# Altium PCB Holder.PcbDoc
Units mm, origin at the board's own origin, x right, y up, seen from the top; angles counter-clockwise.
Board outline 100 x 100 mm, 2 copper layers (Top Layer, Bottom Layer); 8 components, 129 nets, 212 pads, 0 vias.
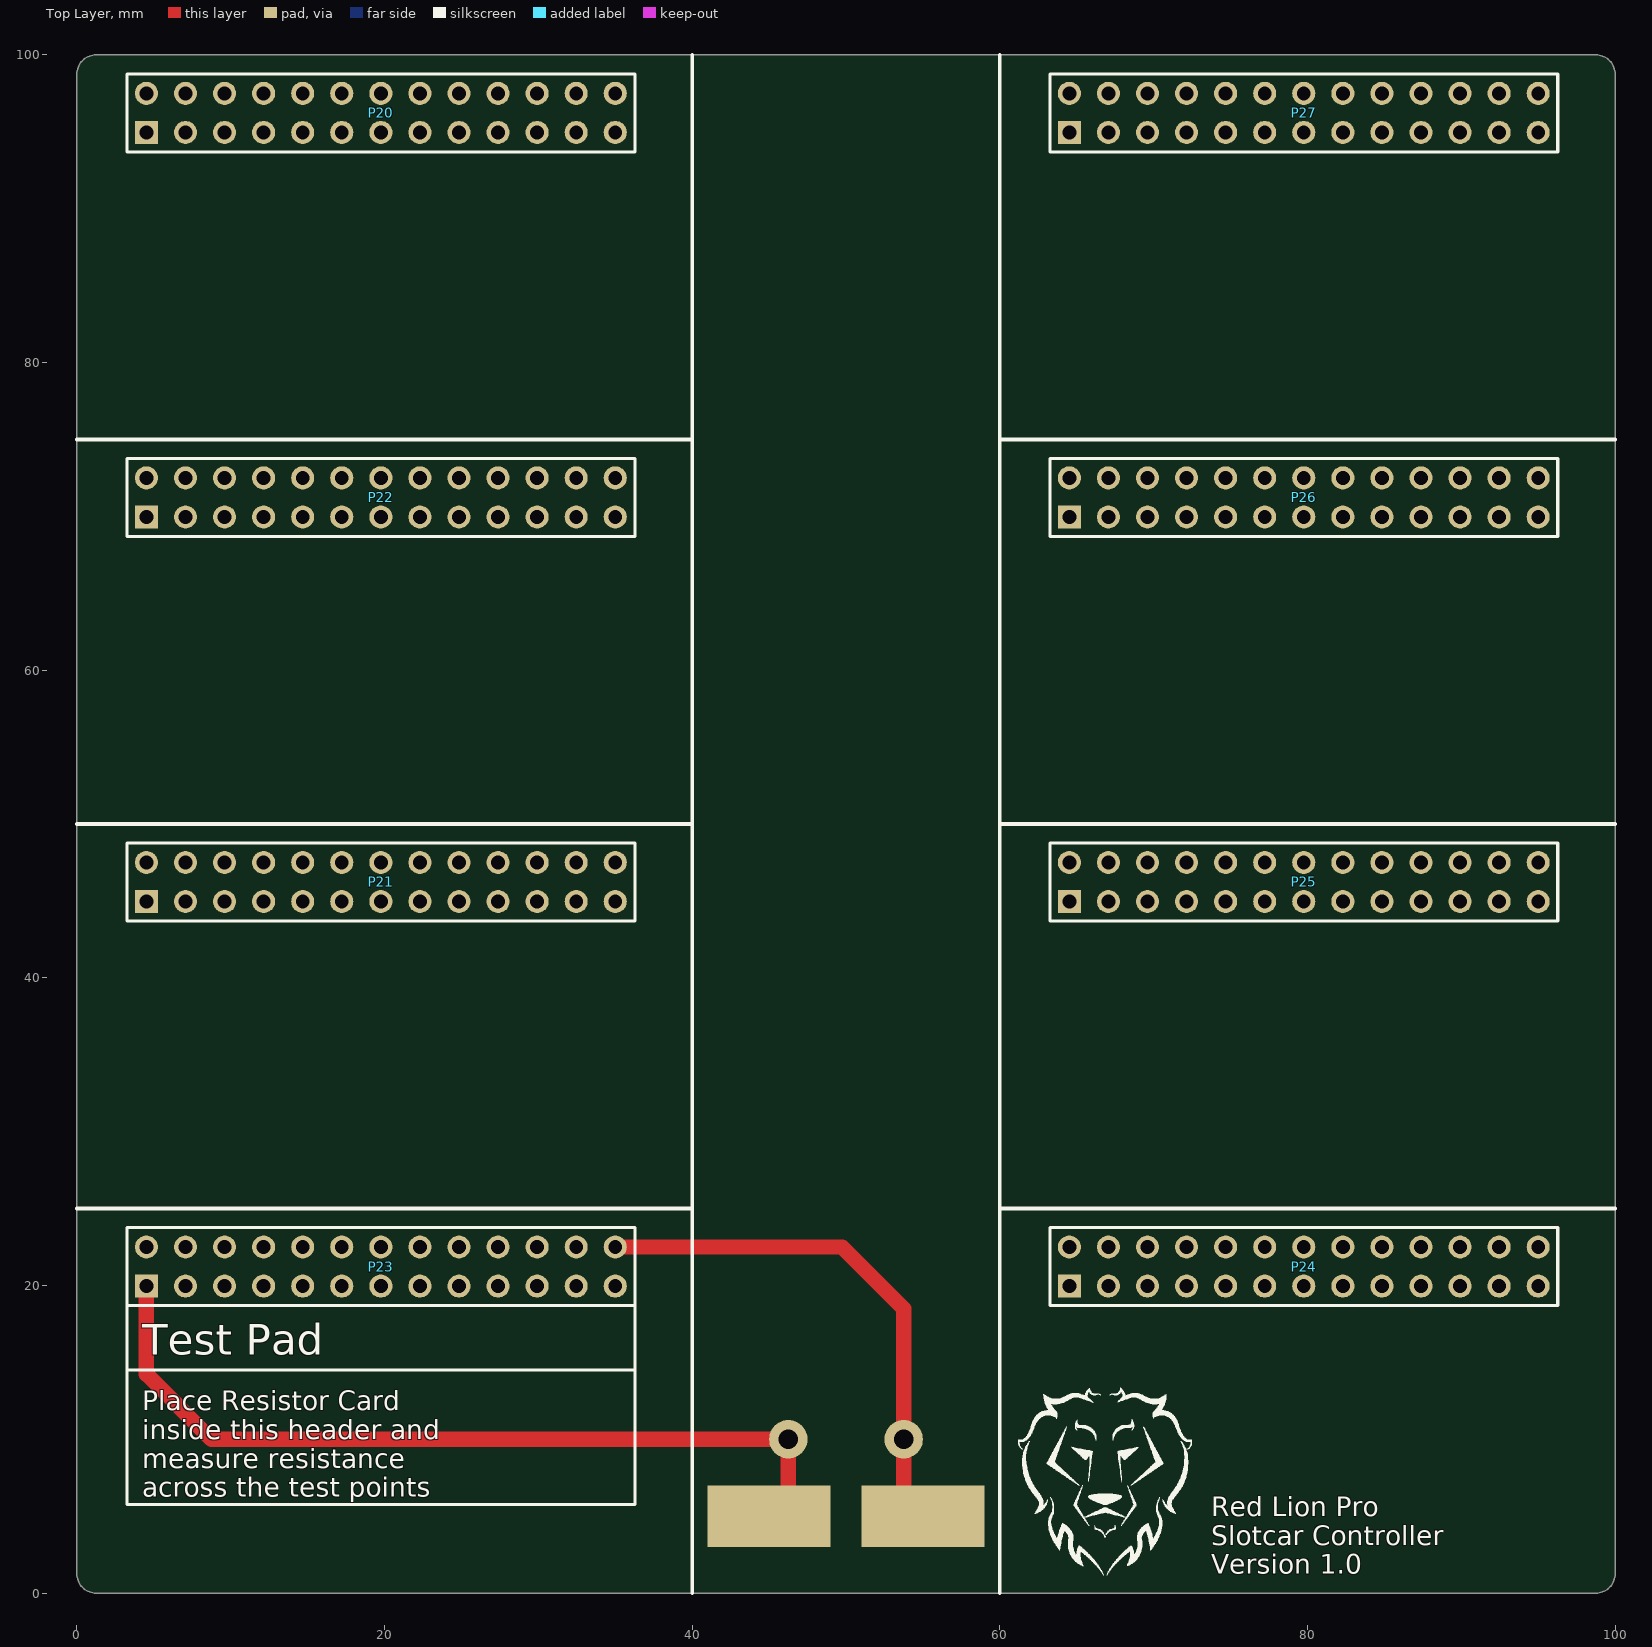
[diagram p0: Top Layer view]
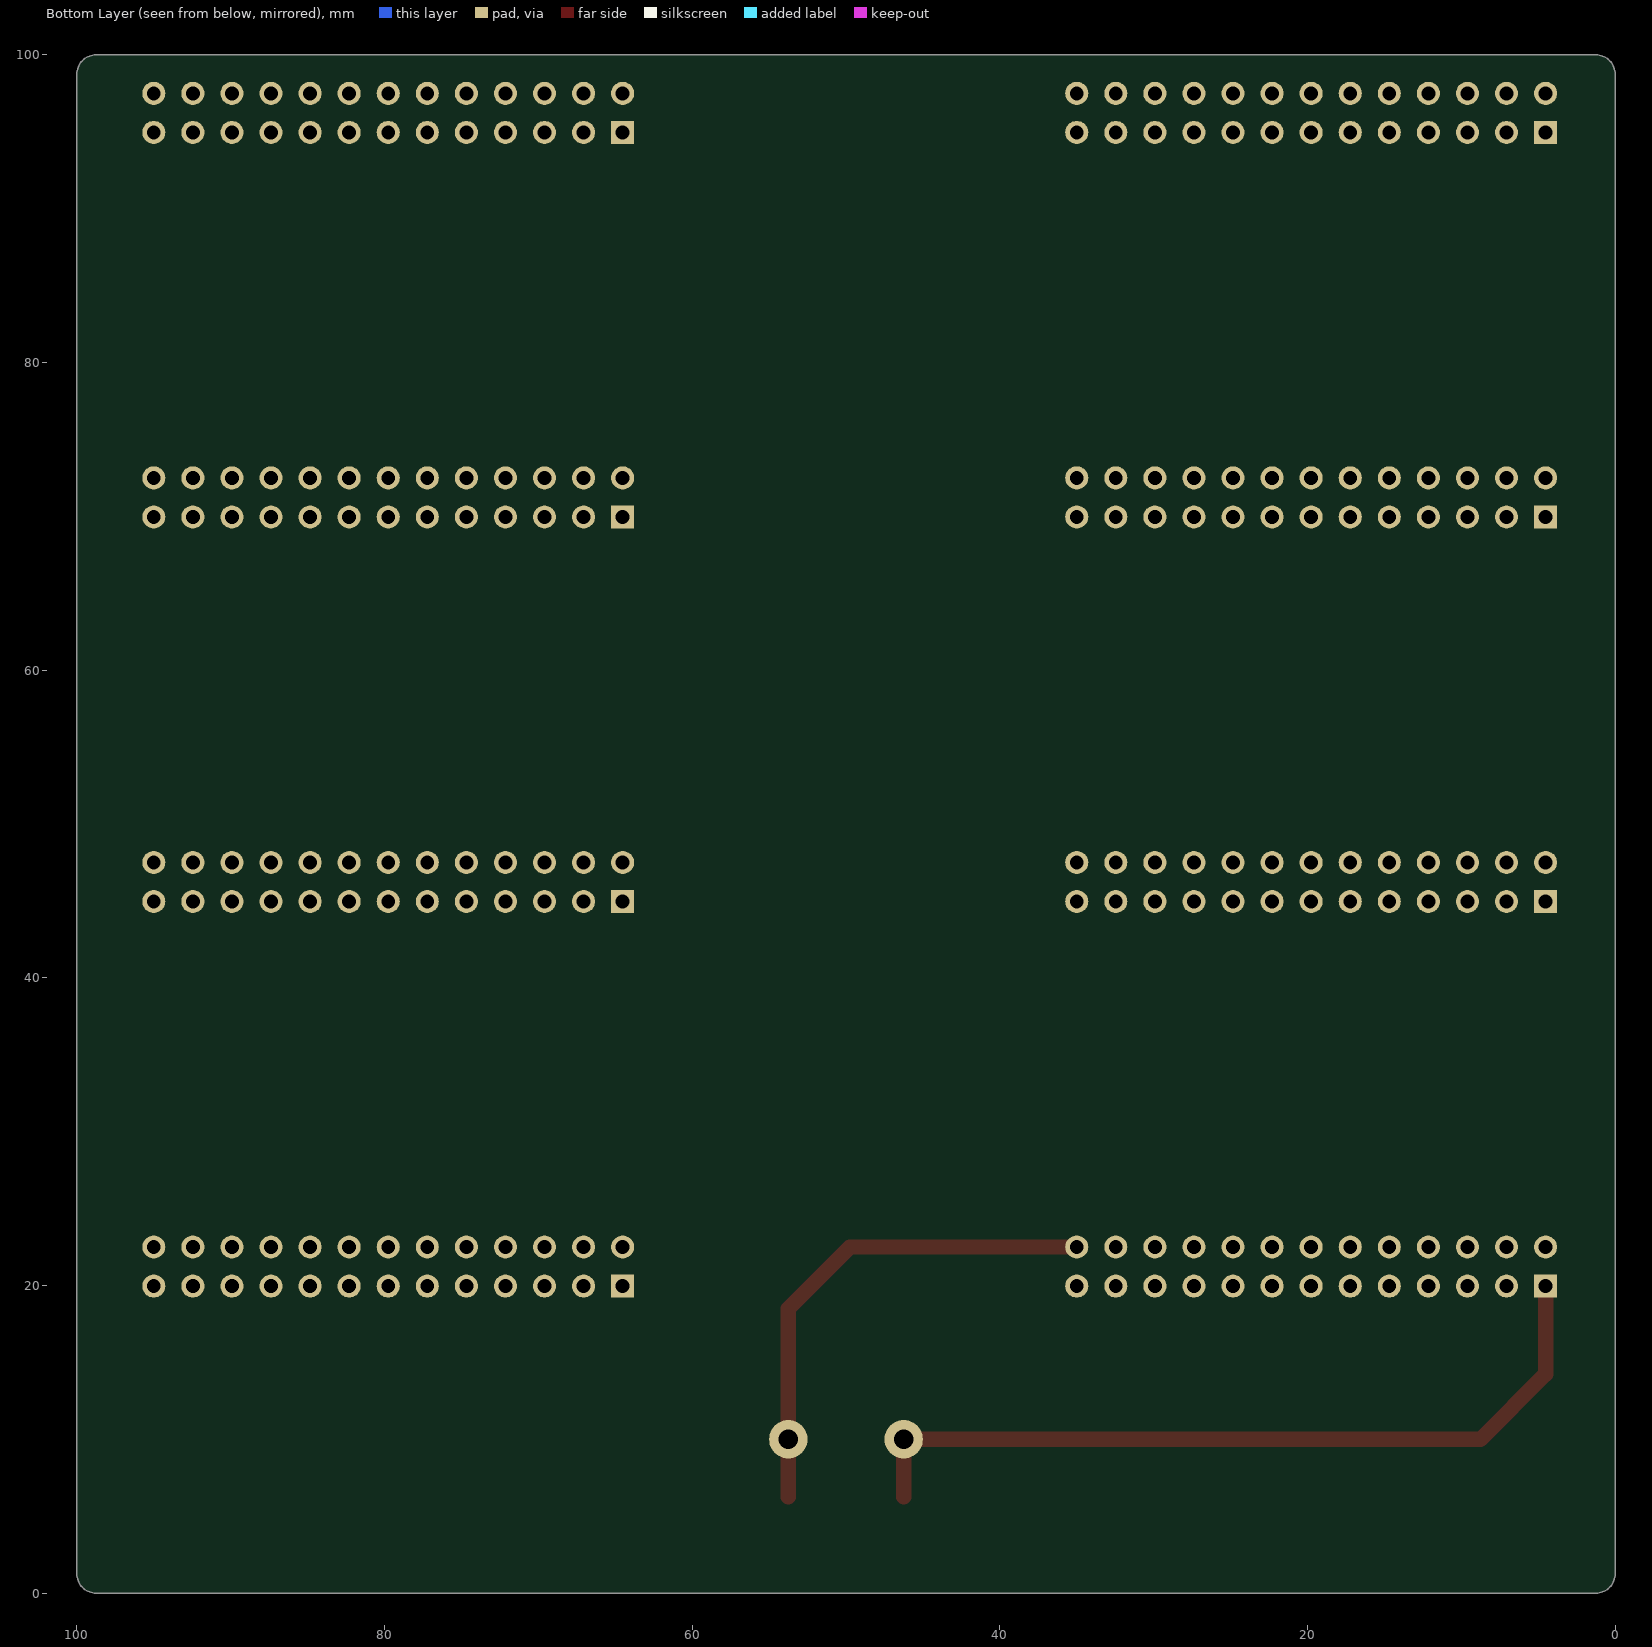
[diagram p1: Bottom Layer view, seen from below]

## Layer stack, top to bottom
Top Solder: solder mask 0.0102, Solder Resist, Dk 3.5
Top Layer: signal copper 0.0356
Dielectric 1: dielectric 0.32, FR-4, Dk 4.8
Bottom Layer: signal copper 0.0356
Bottom Solder: solder mask 0.0102, Solder Resist, Dk 3.5

## Board outline
0,1.25 0,98.75 cw(c1.25,98.75) 1.25,100 98.75,100 cw(c98.75,98.75) 100,98.75 100,1.25 cw(c98.75,1.25) 98.75,0 1.25,0 cw(c1.25,1.25)

## Design rules (kind name [scope] priority, off if disabled: settings)
Clearance [All] p1: gap=0.254
PolygonConnect [All] p1: connectstyle=Relief reliefconductorwidth=0.254 reliefentries=4 polygonreliefangle="90 Angle" airgapwidth=0.254
RoutingVias [All] p1: holewidth=0.711 width=1.27 viastyle="Through Hole" minholewidth=0.711 minwidth=1.27 maxholewidth=0.711 maxwidth=1.27
SolderMaskExpansion [All] p1: expansion=0.102
Width [All] p1: maxlimit=20 minlimit=0.01 preferedwidth=0.254
30 further rules are at their usual default settings.

## Classes and differential pairs
component class Handle: P20 P22 P23

## Components (designator, comment, footprint, x,y, rotation, side; value= is the part's Value field where it differs from the comment)
P20 "Header 13X2A" HDR2X13 4.52,94.96 r0 top (schematic designator 0)
P21 "Header 13X2A" HDR2X13 4.52,44.96 r0 top (schematic designator 0)
P22 "Header 13X2A" HDR2X13 4.52,69.96 r0 top (schematic designator 0)
P23 "ResCard" HDR2X13 4.52,19.96 r0 top (schematic designator 0)
P24 "Header 13X2A" HDR2X13 64.52,19.96 r0 top (schematic designator 0)
P25 "Header 13X2A" HDR2X13 64.52,44.96 r0 top (schematic designator 0)
P26 "Header 13X2A" HDR2X13 64.52,69.96 r0 top (schematic designator 0)
P27 "Header 13X2A" HDR2X13 64.52,94.96 r0 top (schematic designator 0)

## Footprints (in the part's own frame and the unit in brackets; to place one, negate y for a bottom-side part, rotate by r counter-clockwise, add the part's x,y. Pads: shape width x height; smd on the part's side, far side on the other; paste and mask are expansions set on the pad)
HDR2X13 [mm] "Connector; Header; 13x2 Position"
  rect 1.5x1.5 hole 0.9: 1(0,0)
  round 1.5 hole 0.9: 2(0,2.54) 3(2.54,0) 4(2.54,2.54) 5(5.08,0) 6(5.08,2.54) 7(7.62,0) 8(7.62,2.54) 9(10.16,0) 10(10.16,2.54) 11(12.7,0) 12(12.7,2.54) 13(15.24,0) 14(15.24,2.54) 15(17.78,0) 16(17.78,2.54) 17(20.32,0) 18(20.32,2.54) 19(22.86,0) 20(22.86,2.54) 21(25.4,0) 22(25.4,2.54) 23(27.94,0) 24(27.94,2.54) 25(30.48,0) 26(30.48,2.54)
  silkscreen extent -1.27,-1.27 31.75,3.81

## Part data
P20 P21 P22 P24 P25 P26 P27: "Header, 13-Pin, Dual row"
P23: library part "Header 13X2", "Header, 13-Pin, Dual row"

## Free pads (board coordinates)
  round 2.5 hole 1.25: 1(46.25,10) 2(53.75,10)
  rect 8x4 smd: 3(45,5) 4(55,5)

## Nets (pads, with @x,y where several pads share a name; then routed paths per layer and width w, separated by ;. In a path a pad name is that pad's centre, name@x,y a point inside that pad or via, vN(x,y) a via of type N, cw(c..) or ccw(c..) an arc to the next point about the centre after c; other vN are vias at no path point)
+5V: 
GND: 
NetD1_1: 
NetD1_2: 
NetD2_1: 
NetD2_2: 
NetD3_1: 
NetD3_2: 
NetD4_1: 
NetD4_2: 
NetD5_1: 
NetD5_2: 
NetD6_2: 
NetD8_1: 
NetD10_1: 
NetD12_2: 
NetD13_2: 
NetD14_2: 
NetD15_1: 
NetD16_2: 
NetD17_1: 
NetD18_1: 
NetD19_1: 
NetD20_1: 
NetD21_1: 
NetD22_1: 
NetDP1_1: 
NetDP1_2: 
NetDP1_3: 
NetDP1_4: 
NetDP1_5: 
NetDP1_7: 
NetDP1_8: 
NetDP1_9: 
NetDP1_10: 
NetDP1_11: 
NetDP1_12: 
NetP1_3: 
NetP2_1: 
NetP2_3: 
NetP3_1: 
NetP4_1: 
NetP4_4: 
NetP5_1: 
NetP5_2: 
NetP5_3: 
NetP5_4: 
NetP6_2: 
NetP6_3: 
NetP6_4: 
NetP8_2: 
NetP9_1: 
NetP9_3: 
NetP9_4: 
NetP9_5: 
NetP10_2: 
NetP11_1: P23.1 pad.1 pad.3 | length 53
  Top Layer w1: P23.1 4.52,14.23 8.75,10 pad.1 pad.3@46.25,6.25
NetP11_2: P23.2
NetP11_3: P23.3
NetP11_4: P23.4
NetP11_5: P23.5
NetP11_6: P23.6
NetP11_7: P23.7
NetP11_8: P23.8
NetP11_9: P23.9
NetP11_10: P23.10
NetP11_11: P23.11
NetP11_12: P23.12
NetP11_13: P23.13
NetP11_14: P23.14
NetP11_15: P23.15
NetP11_16: P23.16
NetP11_17: P23.17
NetP11_18: P23.18
NetP11_19: P23.19
NetP11_20: P23.20
NetP11_21: P23.21
NetP11_22: P23.22
NetP11_23: P23.23
NetP11_24: P23.24
NetP11_25: P23.25
NetP11_26: P23.26 pad.2 pad.4 | length 32.7
  Top Layer w1: P23.26 49.75,22.5 53.75,18.5 pad.2 pad.4@53.75,6.25
NetP12_1: P22.1
NetP12_2: P22.2
NetP12_3: P22.3
NetP12_4: P22.4
NetP12_5: P22.5
NetP12_6: P22.6
NetP12_7: P22.7
NetP12_8: P22.8
NetP12_9: P22.9
NetP12_10: P22.10
NetP12_11: P22.11
NetP12_12: P22.12
NetP12_13: P22.13
NetP12_14: P22.14
NetP12_15: P22.15
NetP12_16: P22.16
NetP12_17: P22.17
NetP12_18: P22.18
NetP12_19: P22.19
NetP12_20: P22.20
NetP12_21: P22.21
NetP12_22: P22.22
NetP12_23: P22.23
NetP12_24: P22.24
NetP12_25: P22.25
NetP12_26: P22.26
NetP13_1: 
NetP15_1: 
NetP16_1: 
NetP17_5: 
NetP17_6: 
NetQ2_1: 
NetQ3_1: 
NetQ4_1: 
NetQ5_1: 
NetR5_1: 
NetR7_1: 
NetR8_1: 
NetR12_1: 
NetR12_2: 
NetR12_3: 
NetR12_4: 
NetR13_1: 
NetR13_2: 
NetR13_3: 
NetRE1_6: 
V+: 
pads on no net: P20.1 P20.2 P20.3 P20.4 P20.5 P20.6 P20.7 P20.8 P20.9 P20.10 P20.11 P20.12 P20.13 P20.14 P20.15 P20.16 P20.17 P20.18 P20.19 P20.20 P20.21 P20.22 P20.23 P20.24 P20.25 P20.26 P21.1 P21.2 P21.3 P21.4 P21.5 P21.6 P21.7 P21.8 P21.9 P21.10 P21.11 P21.12 P21.13 P21.14 P21.15 P21.16 P21.17 P21.18 P21.19 P21.20 P21.21 P21.22 P21.23 P21.24 P21.25 P21.26 P24.1 P24.2 P24.3 P24.4 P24.5 P24.6 P24.7 P24.8 P24.9 P24.10 P24.11 P24.12 P24.13 P24.14 P24.15 P24.16 P24.17 P24.18 P24.19 P24.20 P24.21 P24.22 P24.23 P24.24 P24.25 P24.26 P25.1 P25.2 P25.3 P25.4 P25.5 P25.6 P25.7 P25.8 P25.9 P25.10 P25.11 P25.12 P25.13 P25.14 P25.15 P25.16 P25.17 P25.18 P25.19 P25.20 P25.21 P25.22 P25.23 P25.24 P25.25 P25.26 P26.1 P26.2 P26.3 P26.4 P26.5 P26.6 P26.7 P26.8 P26.9 P26.10 P26.11 P26.12 P26.13 P26.14 P26.15 P26.16 P26.17 P26.18 P26.19 P26.20 P26.21 P26.22 P26.23 P26.24 P26.25 P26.26 P27.1 P27.2 P27.3 P27.4 P27.5 P27.6 P27.7 P27.8 P27.9 P27.10 P27.11 P27.12 P27.13 P27.14 P27.15 P27.16 P27.17 P27.18 P27.19 P27.20 P27.21 P27.22 P27.23 P27.24 P27.25 P27.26

## Silkscreen, mask and mechanical layers (free items; w line width, h text height)
Top Overlay:
  drawing of 2512 lines, arcs and shapes, not listed
  text "Test Pad" at 4.25,15.5 h2
  text "Place Resistor Card / inside this header and  / measure resistance  / across the test points" at 4.25,6.25 h1.25
  text "Red Lion Pro / Slotcar Controller / Version 1.0" at 73.75,1.25 h1.25
Mechanical 1:
  lines w0.25: 0,1.25 0,98.75 ; 1.25,0 98.75,0 ; 1.25,100 98.75,100 ; 100,1.25 100,98.75 ; 0,50 0,50
  lines w0.254: 0,1.25 ccw(c1.25,1.25) 1.25,0 ; 0,98.75 cw(c1.25,98.75) 1.25,100 ; 98.75,0 ccw(c98.75,1.25) 100,1.25 ; 98.75,100 cw(c98.75,98.75) 100,98.75